# Allegro board LED.brd
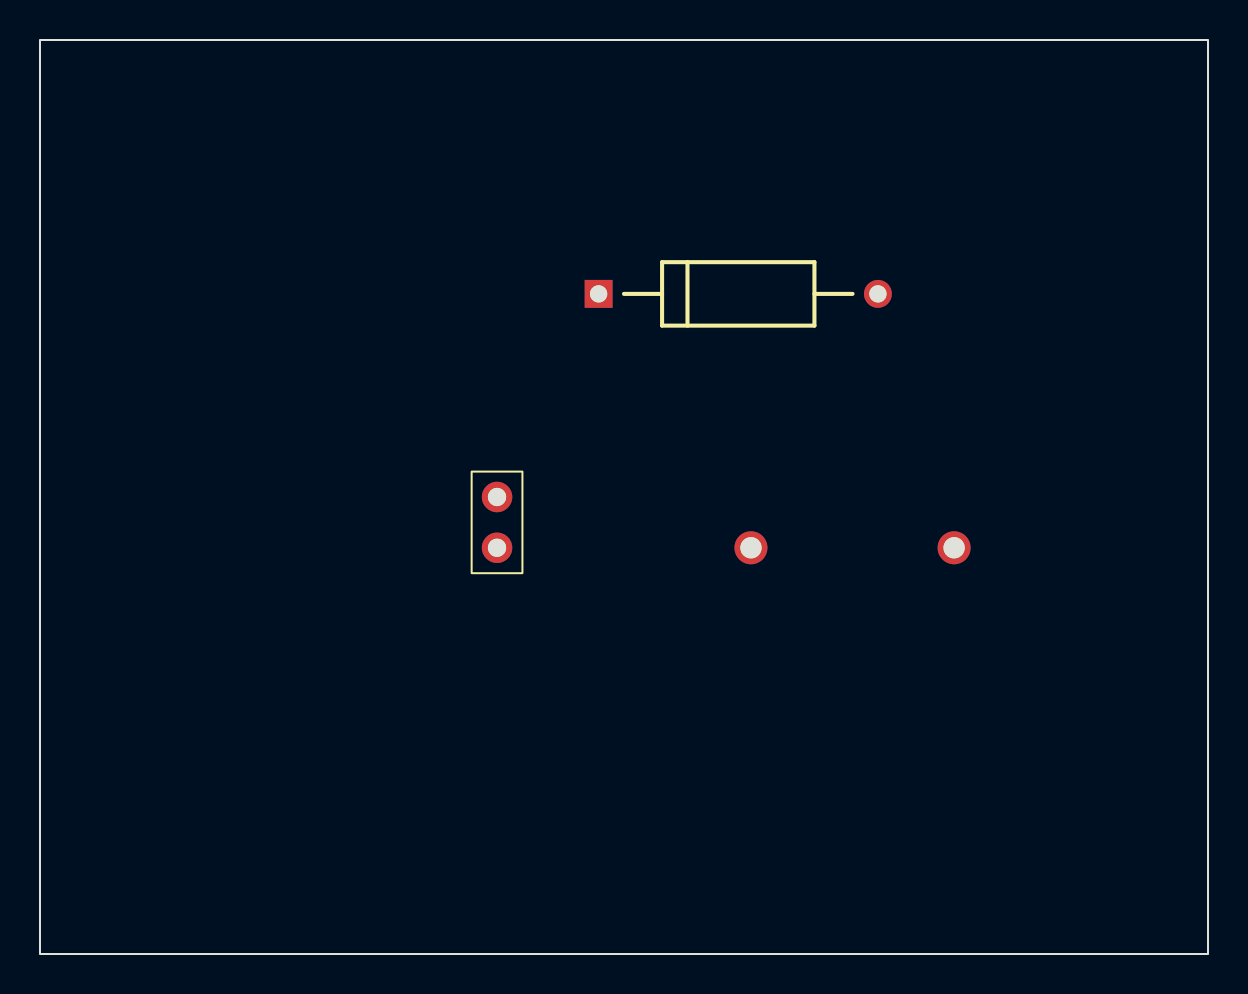
[diagram p0: board, top side]
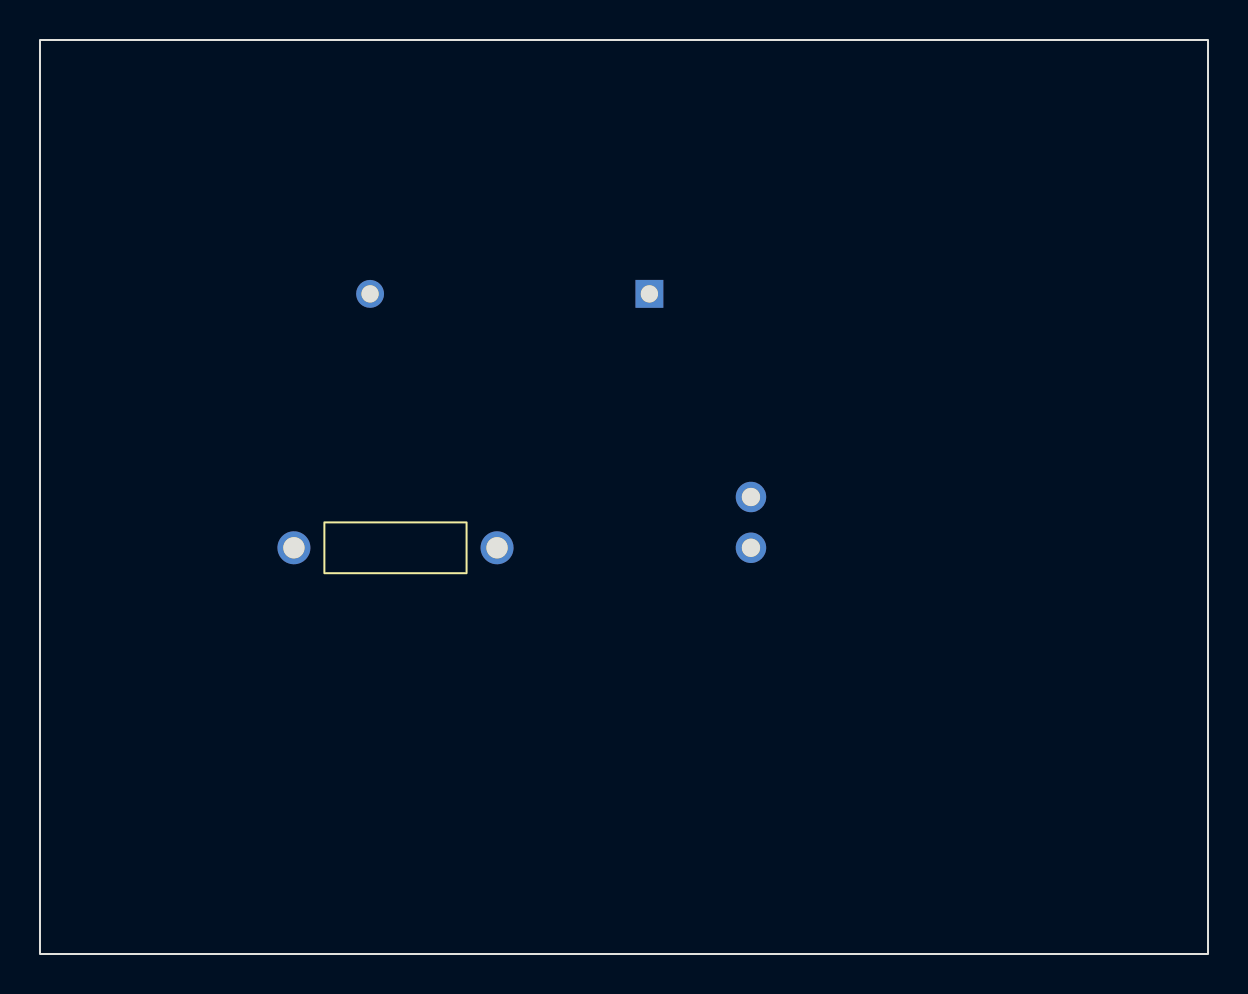
[diagram p1: board, bottom side, seen from below]

Outline 58.42 x 45.72 mm; copper layers: TOP, BOTTOM. Coordinates in mm from the lower left corner of the outline.
Outline path: rectangle 0,0 58.42,45.72

## Design rules (mm)
constraint set DEFAULT: min track width 0.127

## Placement (name value [footprint] x y rotation side)
D2  LED  [DAX1DO7]  27.94 33.02 0 top
J1  CON2  [JUMPER2]  22.86 20.32 90 top
R1  R  [RES400]  45.72 20.32 270 bottom

## Library data of the parts
D2 = LED
J1 = CON2: User Part Number: ***
R1 = R: Tolerance: ***; User Part Number: ***

## Footprints (pads in the part's own frame, mm; a bottom-side part is the same pattern mirrored in y, then rotated)
DAX1DO7
  rect 1.397x1.397 hole 0.864: 1(0,0)
  round 1.397 hole 0.864: 2(13.97,0)
JUMPER2
  round 1.524 hole 0.914: 1(0,0) 2(2.54,0)
RES400
  round 1.651 hole 1.067: 1(0,0) 2(0,10.16)

## Nets
N00122: J1.1 R1.2
N00162: D2.1 J1.2
N00203: D2.2(CATHODE) R1.1
